# Altium PCB PCB2.PcbDoc
Units mil, origin at the board's own origin, x right, y up, seen from the top; angles counter-clockwise.
Board outline 3040 x 2755 mil, 2 copper layers (Top Layer, Bottom Layer); 100 components, 34 nets, 244 pads, 4 vias.
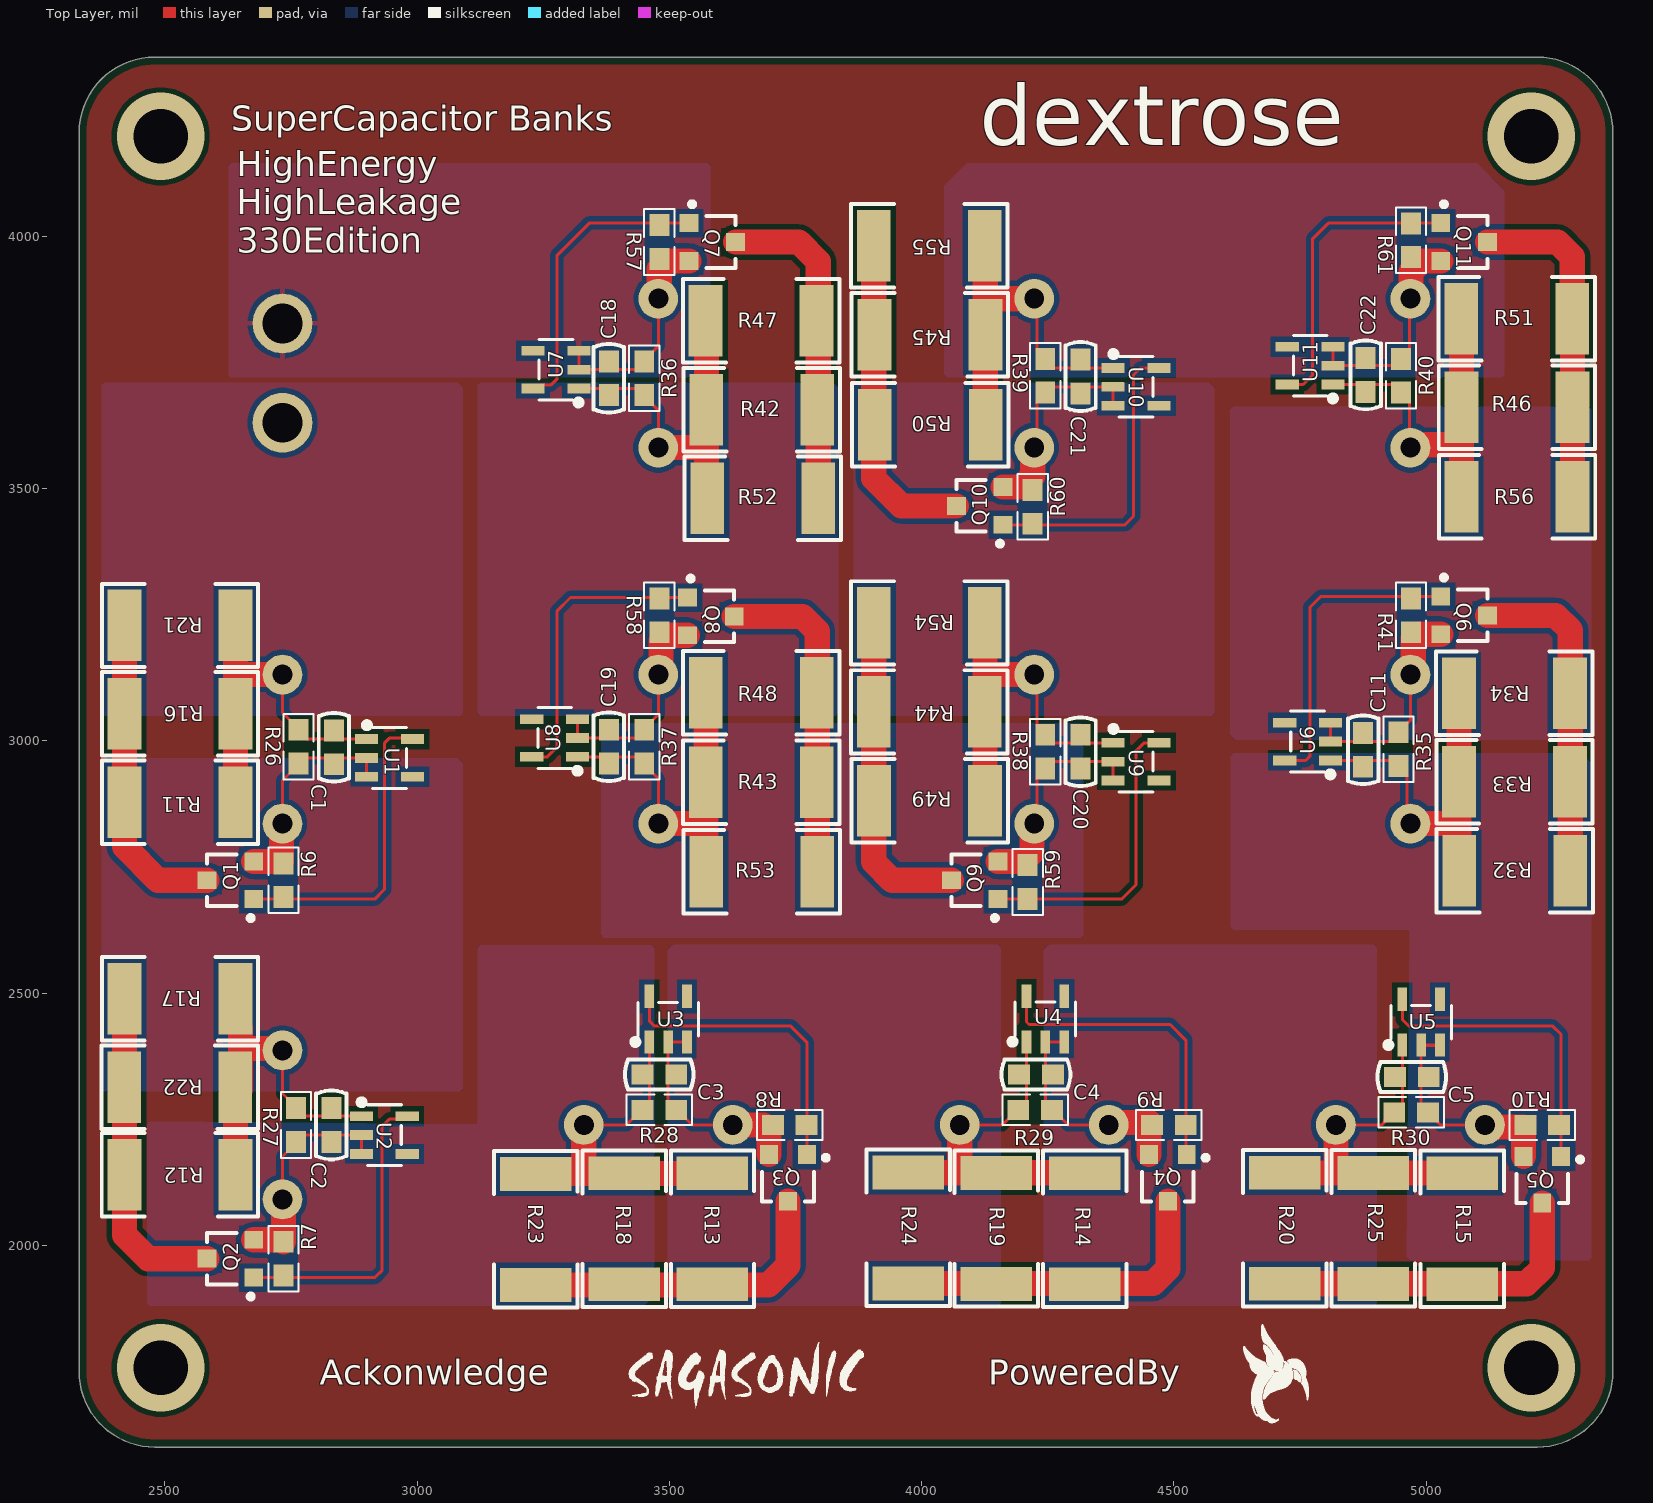
[diagram p0: Top Layer view]
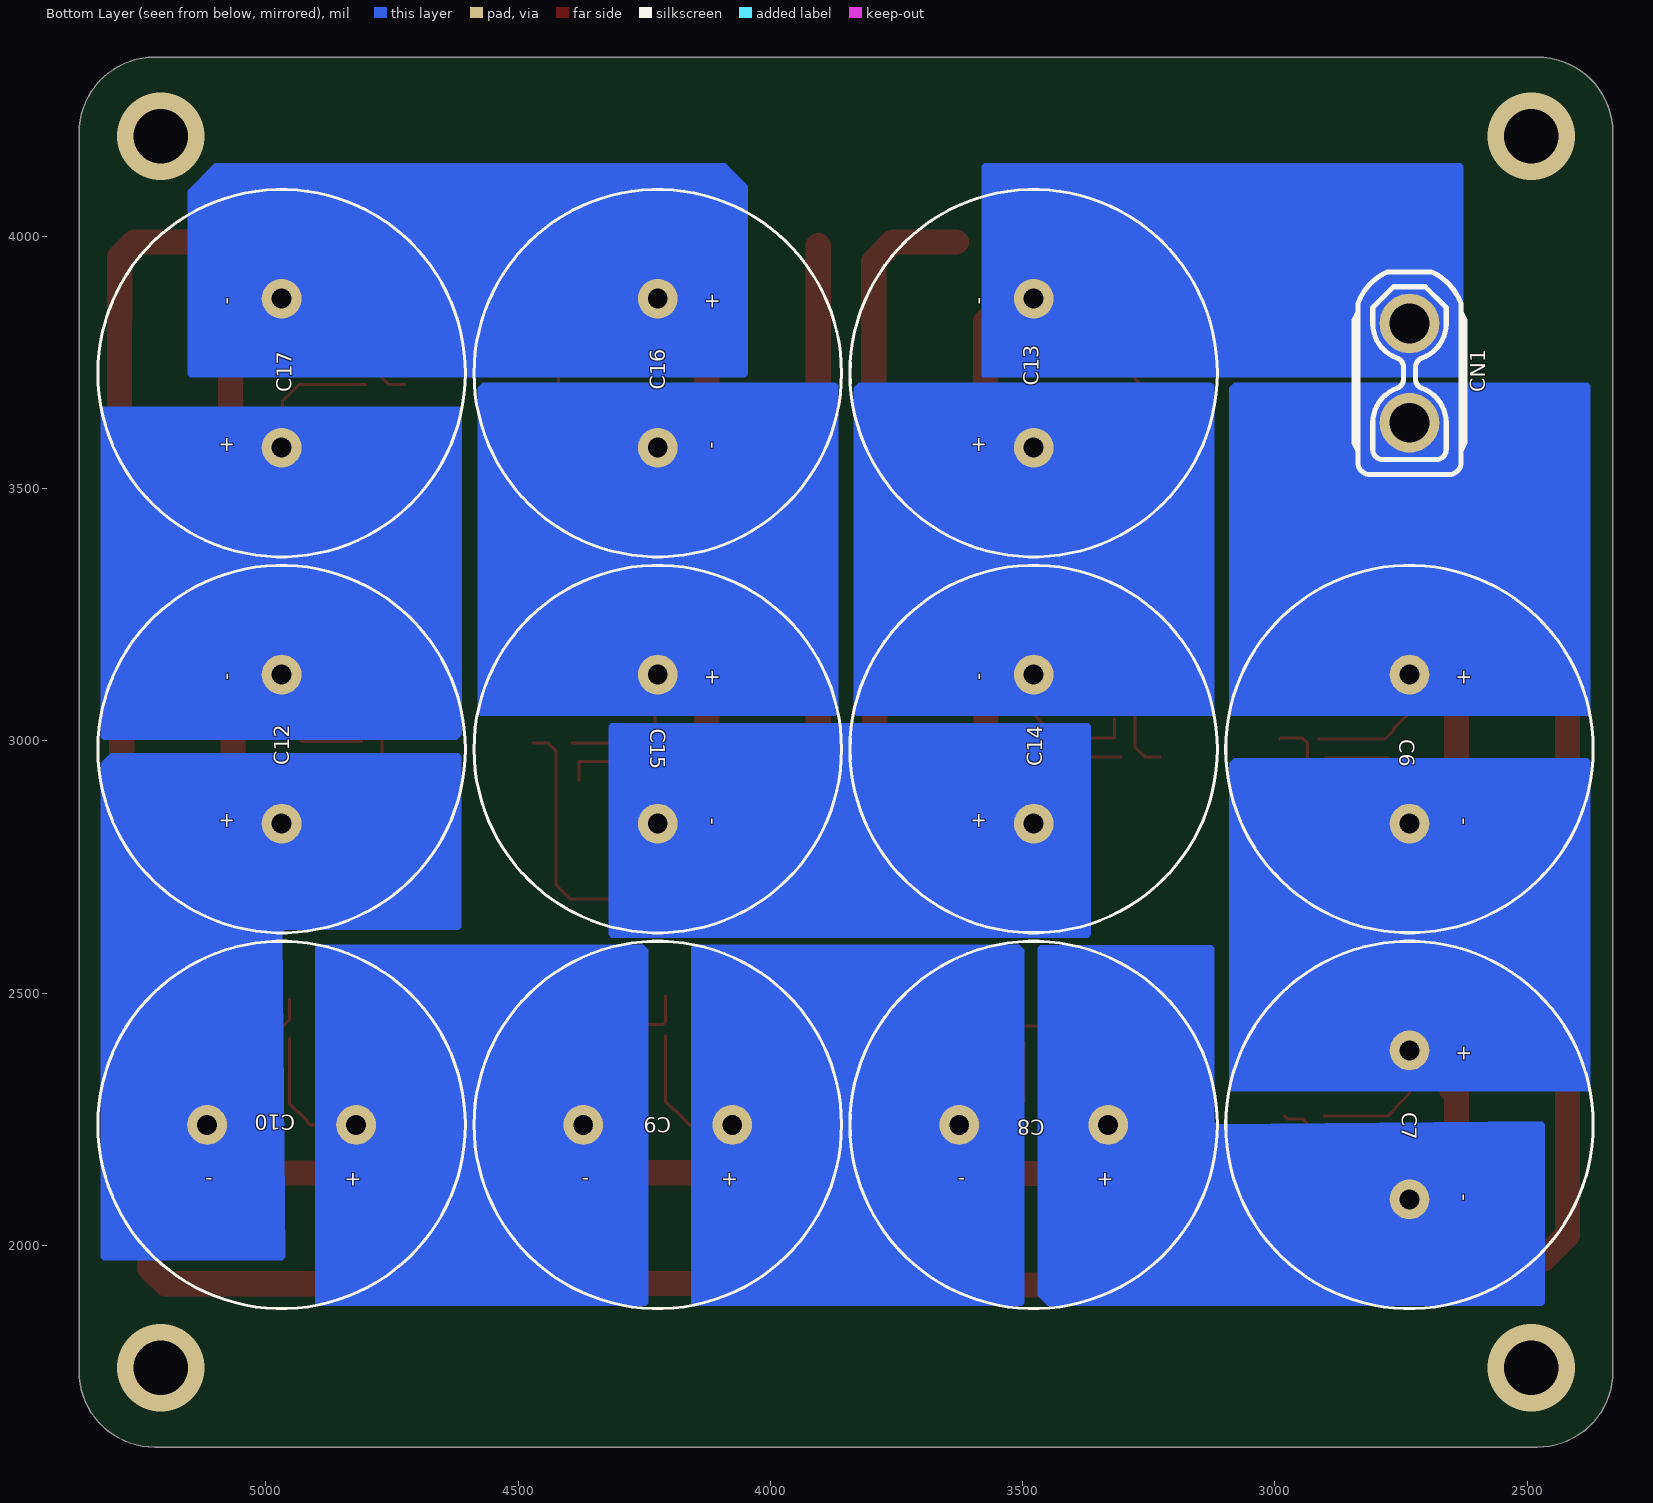
[diagram p1: Bottom Layer view, seen from below]

## Layer stack, top to bottom
Top Solder: solder mask 0.4, Solder Resist, Dk 3.5
Top Layer: signal copper 1.4
Dielectric 1: dielectric 12.6, FR-4, Dk 4.8
Bottom Layer: signal copper 1.4
Bottom Solder: solder mask 0.4, Solder Resist, Dk 3.5

## Board outline
2330,1750 ccw(c2480,1750) 2480,1600 5220,1600 ccw(c5220,1750) 5370,1750 5370,4205 ccw(c5220,4205) 5220,4355 2480,4355 ccw(c2480,4205) 2330,4205

## Design rules (kind name [scope] priority, off if disabled: settings)
BoardOutlineClearance [All] p1: gap=15 ignorepadtopadclearanceinfootprint=FALSE
Clearance Clearance_1 [InPolygon] p1: gap=10 ignorepadtopadclearanceinfootprint=FALSE
Clearance [All] p2: gap=6 ignorepadtopadclearanceinfootprint=FALSE
MinimumSolderMaskSliver [All] p1: minsoldermaskwidth=0
PolygonConnect [All] p1: connectstyle=Relief reliefconductorwidth=10 reliefentries=4 polygonreliefangle="90 Angle" airgapwidth=10
RoutingVias [All] p1: holewidth=28 width=50 viastyle="Through Hole" minholewidth=28 minwidth=50 maxholewidth=28 maxwidth=50
SilkToSilkClearance [All] p1: silktosilkclearance=0
SilkToSolderMaskClearance [IsPad] p1: minsilkscreentomaskgap=0 clearancetoexposedcopper=TRUE
SolderMaskExpansion [All] p1: expansion=4 istentingtop=FALSE
Width [All] p1: maxlimit=300 minlimit=6 preferedwidth=10
27 further rules are at their usual default settings.

## Components (designator, comment, footprint, x,y, rotation, side; value= is the part's Value field where it differs from the comment)
C1 "100nF" C-RAD-0603 2835,2986.93 r270 top
C2 "100nF" C-RAD-0603 2830,2238.46 r270 top
C3 "100nF" C-RAD-0603 3480,2338.46 r0 top
C4 "100nF" C-RAD-0603 4226.54,2338.46 r0 top
C5 "100nF" C-RAD-0603 4971.54,2333.46 r0 top
C6 "SuperCap" C_supercap1 2733.15,2983.46 r270 bottom
C7 "SuperCap" C_supercap1 2733.15,2238.57 r270 bottom
C8 "SuperCap" C_supercap1 3478.02,2238.57 r0 bottom
C9 "SuperCap" C_supercap1 4223.05,2238.57 r0 bottom
C10 "SuperCap" C_supercap1 4968.66,2238.57 r0 bottom
C11 "100nF" C-RAD-0603 4875,2981.93 r90 top
C12 "SuperCap" C_supercap1 4968.66,2983.45 r90 bottom
C13 "SuperCap" C_supercap1 3478.02,3728.62 r90 bottom
C14 "SuperCap" C_supercap1 3478.02,2983.46 r90 bottom
C15 "SuperCap" C_supercap1 4223.05,2983.45 r270 bottom
C16 "SuperCap" C_supercap1 4223.05,3728.62 r270 bottom
C17 "SuperCap" C_supercap1 4968.66,3728.62 r90 bottom
C18 "100nF" C-RAD-0603 3380,3718.46 r90 top
C19 "100nF" C-RAD-0603 3380,2988.46 r90 top
C20 "100nF" C-RAD-0603 4315,2978.46 r270 top
C21 "100nF" C-RAD-0603 4315,3721.93 r270 top
C22 "100nF" C-RAD-0603 4880,3725 r90 top
CN1 "Changzhou" CONN-TH_XT30UPB-F 2733.15,3728.62 r90 bottom
Q1 "AO3400A" SOT-23 2630,2723.46 r90 top
Q2 "AO3400A" SOT-23 2630,1973.46 r90 top
Q3 "AO3400A" SOT-23 3735,2133.46 r180 top
Q4 "AO3400A" SOT-23 4488,2133.46 r180 top
Q5 "AO3400A" SOT-23 5230,2130 r180 top
Q6 "AO3400A" SOT-23 5075,3248.46 r270 top
Q7 "AO3400A" SOT-23 3585,3988.46 r270 top
Q8 "AO3400A" SOT-23 3582.17,3246.46 r270 top
Q9 "AO3400A" SOT-23 4105,2723.46 r90 top
Q10 "AO3400A" SOT-23 4115,3465.46 r90 top
Q11 "AO3400A" SOT-23 5075,3988.46 r270 top
R6 "10kΩ" 0603-1 2735,2723.46 r270 top
R7 "10kΩ" 0603-1 2735,1973.46 r270 top
R8 "10kΩ" 0603-1 3738.46,2238.46 r0 top
R9 "10kΩ" 0603-1 4490,2238.46 r0 top
R10 "10kΩ" 0603-1 5230,2238.46 r0 top
R11 "2.2Ω" 2512 2530,2878.46 r0 top
R12 "2.2Ω" 2512 2529.91,2139.97 r0 top
R13 "2.2Ω" 2512 3585.39,2033 r90 top
R14 "2.2Ω" 2512 4322.89,2032.93 r90 top
R15 "2.2Ω" 2512 5071.41,2032.95 r90 top
R16 "2.2Ω" 2512 2530,3053.46 r0 top
R17 "2.2Ω" 2512 2530,2488.46 r0 top
R18 "2.2Ω" 2512 3410.56,2032.57 r90 top
R19 "2.2Ω" 2512 4148.04,2033.25 r90 top
R20 "2.2Ω" 2512 4719.65,2033.94 r90 top
R21 "2.2Ω" 2512 2530,3228.46 r0 top
R22 "2.2Ω" 2512 2529.28,2313.58 r0 top
R23 "2.2Ω" 2512 3235,2031.54 r90 top
R24 "2.2Ω" 2512 3973.42,2034.42 r90 top
R25 "2.2Ω" 2512 4895,2033.46 r90 top
R26 "10kΩ" 0603-1 2765,2988.46 r270 top
R27 "10kΩ" 0603-1 2760,2238.46 r270 top
R28 "10kΩ" 0603-1 3480,2268.46 r0 top
R29 "10kΩ" 0603-1 4225,2268.46 r0 top
R30 "10kΩ" 0603-1 4970,2263.46 r0 top
R32 "2.2Ω" 2512 5175.64,2742.71 r180 top
R33 "2.2Ω" 2512 5175,2918.46 r180 top
R34 "2.2Ω" 2512 5174.75,3094.44 r180 top
R35 "10kΩ" 0603-1 4945,2983.46 r90 top
R36 "10kΩ" 0603-1 3450,3718.46 r90 top
R37 "10kΩ" 0603-1 3450,2988.46 r90 top
R38 "10kΩ" 0603-1 4245,2978.46 r270 top
R39 "10kΩ" 0603-1 4245,3723.46 r270 top
R40 "10kΩ" 0603-1 4950,3723.46 r90 top
R41 "10kΩ" 0603-1 4970,3248.46 r90 top
R42 "2.2Ω" 2512 3682.85,3656.25 r180 top
R43 "2.2Ω" 2512 3681.81,2917.79 r180 top
R44 "2.2Ω" 2512 4014.8,3057.03 r0 top
R45 "2.2Ω" 2512 4016.27,3804.95 r0 top
R46 "2.2Ω" 2512 5179.81,3661.2 r180 top
R47 "2.2Ω" 2512 3681.75,3832.1 r180 top
R48 "2.2Ω" 2512 3681.98,3095.16 r180 top
R49 "2.2Ω" 2512 4015.75,2881.38 r0 top
R50 "2.2Ω" 2512 4016.89,3626.68 r0 top
R51 "2.2Ω" 2512 5179.6,3836.45 r180 top
R52 "2.2Ω" 2512 3685,3480.46 r180 top
R53 "2.2Ω" 2512 3682.83,2740.46 r180 top
R54 "2.2Ω" 2512 4015,3233.46 r0 top
R55 "2.2Ω" 2512 4015,3981.46 r0 top
R56 "2.2Ω" 2512 5180,3483.46 r180 top
R57 "10kΩ" 0603-1 3480,3988.46 r90 top
R58 "10kΩ" 0603-1 3480,3248.46 r90 top
R59 "10kΩ" 0603-1 4210,2720 r270 top
R60 "10kΩ" 0603-1 4220,3463.46 r270 top
R61 "10kΩ" 0603-1 4970,3991.93 r90 top
U1 "BW6103" SOT-23-5_L3.0-W1.7-P0.95-LS2.8-BL 2945.42,2965.86 r270 top
U2 "BW6103" SOT-23-5_L3.0-W1.7-P0.95-LS2.8-BL 2935,2218.46 r270 top
U3 "BW6103" SOT-23-5_L3.0-W1.7-P0.95-LS2.8-BL 3497.6,2448.04 r0 top
U4 "BW6103" SOT-23-5_L3.0-W1.7-P0.95-LS2.8-BL 4245,2448.46 r0 top
U5 "BW6103" SOT-23-5_L3.0-W1.7-P0.95-LS2.8-BL 4990,2441.93 r0 top
U6 "BW6103" SOT-23-5_L3.0-W1.7-P0.95-LS2.8-BL 4765,2998.46 r90 top
U7 "BW6103" SOT-23-5_L3.0-W1.7-P0.95-LS2.8-BL 3275,3735.46 r90 top
U8 "BW6103" SOT-23-5_L3.0-W1.7-P0.95-LS2.8-BL 3272.83,3005.46 r90 top
U9 "BW6103" SOT-23-5_L3.0-W1.7-P0.95-LS2.8-BL 4425,2958.46 r270 top
U10 "BW6103" SOT-23-5_L3.0-W1.7-P0.95-LS2.8-BL 4425,3701.46 r270 top
U11 "BW6103" SOT-23-5_L3.0-W1.7-P0.95-LS2.8-BL 4770,3743.46 r90 top

## Footprints (in the part's own frame and the unit in brackets; to place one, negate y for a bottom-side part, rotate by r counter-clockwise, add the part's x,y. Pads: shape width x height; smd on the part's side, far side on the other; paste and mask are expansions set on the pad)
0603-1 [mm] "贴片带丝印"
  rect 1.1x1 smd: 1(-0.85,0) 2(0.85,0)
  silkscreen extent -1.65,-0.76 1.65,0.76, body extent -1.14,-0.38 1.14,0.38, height 1
2512 [mm] "保险丝"
  rect 1.7x3.6 smd: 1(-2.794,0) 2(2.794,0)
  silkscreen extent -3.94,-2.1 3.94,2.1, body extent -3.17,-1.65 3.17,1.65, height 1.2
C-RAD-0603 [mm] "贴片电容"
  rect 1.1x1 smd: 1(-0.85,0) 2(0.85,0)
  silkscreen extent -1.73,-0.76 1.73,0.76, body extent -1.14,-0.38 1.14,0.38, height 1
C_supercap1 [mm]
  round 2 hole 1: 1(-3.75,0) 2(3.75,0)
  silkscreen extent -9.25,-9.25 9.25,9.25
CONN-TH_XT30UPB-F [mm]
  round 3 hole 2: 1(-2.5,0) 2(2.5,0)
  silkscreen extent -5.1,-2.8 5.1,2.8
SOT-23 [mm]
  rect 0.9x0.95 smd: 1(-0.95,-1.175) 2(0.95,-1.175) 3(0,1.175)
  silkscreen extent -2.03,-1.14 1.3,1.18
SOT-23-5_L3.0-W1.7-P0.95-LS2.8-BL [mm]
  rect 0.49x1.157 smd mask+0.051: 1(-0.95,-1.154) 2(0,-1.154) 3(0.95,-1.154)
  rect 0.49x1.175 smd mask+0.051: 4(0.95,1.154) 5(-0.95,1.154)
  silkscreen extent -1.8,-1.29 1.53,0.85

## Part data
C1 C2 C3 C4 C5 C11 C18 C19 C20 C21 C22: BOM_JLCPCB Part Class="Extended Part", BOM_Manufacturer="Guangdong Fenghua Advanced Tech", BOM_Manufacturer Part=0805CG330J500NT, BOM_Supplier=LCSC, BOM_Supplier Part=C157687, Contributor=LCSC, nameAlias=Capacitance, spicePre=C, spiceSymbolName=0805CG330J500NT
C6 C7 C8 C9 C10 C12 C13 C14 C15 C16 C17: library part "50F 2.7v"
CN1: BOM_JLCPCB Part Class="Extended Part", BOM_Manufacturer="Changzhou Amass Elec", BOM_Manufacturer Part=XT30UPB-F, BOM_Supplier=LCSC, BOM_Supplier Part=C108769, Contributor=LCSC, nameAlias=Value, spicePre=C, spiceSymbolName=XT30UPB-F
Q1 Q2 Q3 Q4 Q5 Q6 Q7 Q8 Q9 Q10 Q11: library part AO3400A_C20917, Continuous Drain Current (Id)=5.7A, Drain Source On Resistance (RDS(on)@Vgs,Id)=26.5mΩ@10V,5.7A, Drain Source Voltage (Vdss)=30V, Gate Threshold Voltage (Vgs(th)@Id)=1.5V@250μA, JLCPCB Part Class="Basic Part", LCSC Part Name="N沟道 30V 5.7A", Manufacturer=AOS, Power Dissipation (Pd)=1.4W, Add into BOM=yes, Convert to PCB=yes, Datasheet=https://atta.szlcsc.com/upload/public/pdf/source/20140107/1457706668533.pdf, Device=AO3400A_C20917, Manufacturer Part=AO3400A, Name=AO3400A, Supplier=LCSC, Supplier Footprint=SOT-23-3L, Supplier Part=C20917, Symbol=AO3400A, Type=N沟道
R6 R7 R8 R9 R10 R26 R27 R28 R29 R30 R35 R36 R37 R38 R39 R40 R41 R57 R58 R59 R60 R61: BOM_JLCPCB Part Class="Basic Part", BOM_Manufacturer=UniOhm, BOM_Manufacturer Part=0603WAF1002T5E, Resistance (Ohms)=10K, BOM_Supplier=LCSC, BOM_Supplier Part=C25804, nameAlias=Resistance, spicePre=R, spiceSymbolName=0603WAF1002T5E
R11 R12 R13 R14 R15 R16 R17 R18 R19 R20 R21 R22 R23 R24 R25 R32 R33 R34 R42 R43 R44 R45 R46 R47 R48 R49 R50 R51 R52 R53 R54 R55 R56: library part 2.2Ω_2512, BOM_JLCPCB Part Class="Basic Part", BOM_Manufacturer=UniOhm, BOM_Manufacturer Part=0603WAF1002T5E, Resistance (Ohms)=10K, BOM_Supplier=LCSC, BOM_Supplier Part=C25804, nameAlias=Resistance, spicePre=R, spiceSymbolName=0603WAF1002T5E
U1 U2 U3 U4 U5 U6 U7 U8 U9 U10 U11: Dropout Voltage=400mV@(500mA), JLCPCB Part Class="Extended Part", Manufacturer=RICHTEK(台湾立锜), Manufacturer Part=RT9013-33GB, Maximum Input Voltage=5.5V, Output Current=500mA, Output Voltage=3.3V, Power Supply Rejection Ratio (PRSS)=50dB@(10kHz), Quiescent Current (Ground Current)=-, Add into BOM=yes, Convert to PCB=yes, Datasheet=https://atta.szlcsc.com/upload/public/pdf/source/20150504/1457707282459.pdf, Device=BW6101, Feature=-, Name=RT9013-33GB, Noise=-, Number of Outputs=1, Output Polarity=正, Output Type=固定, Supplier=LCSC, Supplier Footprint=SOT-23-5, Supplier Part=C47773, Symbol=BW6101

## Via types
v1: diameter 173.23, hole 108.27, Top Layer to Bottom Layer, 4 vias

## Nets (pads, with @x,y where several pads share a name; then routed paths per layer and width w, separated by ;. In a path a pad name is that pad's centre, name@x,y a point inside that pad or via, vN(x,y) a via of type N, cw(c..) or ccw(c..) an arc to the next point about the centre after c; other vN are vias at no path point)
NetC1_1: C1.1 C6.1 CN1.1 R11.2 R16.2 R21.2 R26.1 U1.1 | length 723
  Top Layer w6: C6.1 2733.15,3055.74 2765,3023.9 R26.1 2765,3019.96 2781.7,3003.26 U1.1 U1.1@2913.13,3003.26
  Top Layer w50: R11.2 R16.2 2640,3130 ; R21.2 2640,3130 ; C6.1 2641.1,3131.1 2640,3130
NetC1_2: C1.2 C2.1 C6.2 C7.1 Q1.2 R6.1 R12.2 R17.2 R22.2 R26.2 R27.1 U1.2 U1.3 U2.1 | length 1156.2
  Top Layer w6: R17.2 2640,2440 R17.2@2650,2430 ; C7.1 2733.15,2300.74 2760,2273.9 R27.1 2776.06,2255.86 U2.1 U2.1@2902.71,2255.86 ; C6.2 2733.15,2921.19 2765,2953.03 R26.2 2775.86,2965.86 U1.2 U1.3
  Top Layer w50: R12.2 2639.91,2298.64 2650,2308.73 2650,2390 ; R17.2@2650,2430 2650,2390 ; Q1.2 2731.06,2760.87 2731.06,2833.74 C6.2 ; C7.1 2729.36,2390 2650,2390
NetC2_2: C2.2 C3.1 C7.2 C8.1 Q2.2 R7.1 R13.2 R18.2 R23.2 R27.2 R28.1 U2.2 U2.3 U3.1 | length 1164.7
  Top Layer w6: C7.2 2733.15,2176.19 2760,2203.03 R27.2 2773.46,2218.46 U2.2 U2.3 ; C8.1 3414.67,2238.57 3444.57,2268.46 R28.1 3460.2,2282.13 U3.1 U3.1@3460.2,2415.75
  Top Layer w50: Q2.2 R7.1@2731.06,2010.87 ; R7.1 C7.2@2735,2089.09 ; R23.2@3235.73,2142.27 3325,2142.27 ; C8.1 3330.38,2147.65 3325,2142.27 ; R13.2 3584.65,2142.27 3325,2142.27
NetC3_2: C3.2 C4.1 C8.2 C9.1 Q3.2 R8.1 R14.2 R19.2 R24.2 R28.2 R29.1 U3.2 U3.3 U4.1 | length 1142.7
  Top Layer w6: U3.3 U3.2 3497.6,2284.33 R28.2 3515.43,2268.46 3545.33,2238.57 C8.2 ; C9.1 4159.67,2238.57 4189.57,2268.46 R29.1 4207.6,2284.53 U4.1 U4.1@4207.6,2416.17
  Top Layer w50: C8.2 R8.1@3686.27,2238.57 ; Q3.2 R8.1@3697.6,2231.06 ; R24.2 3974.16,2143.67 4075,2143.67 ; C9.1 4075.41,2144.08 4075,2143.67 ; R14.2 4322.15,2143.67 4075,2143.67
NetC4_2: C4.2 C5.1 C9.2 C10.1 Q4.2 R9.1 R15.2 R20.2 R25.2 R29.2 R30.1 U4.2 U4.3 U5.1 | length 1166.7
  Top Layer w6: U4.3 U4.2 4245,2281.93 R29.2 4260.43,2268.46 4290.33,2238.57 C9.2 ; C10.1 4911.64,2238.57 4917.88,2244.81 4917.88,2246.78 4934.57,2263.46 R30.1 4952.6,2279.53 U5.1 U5.1@4952.6,2409.64
  Top Layer w50: C9.2 4375.37,2243.25 R9.1@4451.75,2243.25 ; Q4.2 R9.1@4450.6,2232.53 ; R20.2 4720.14,2143.44 R25.2@4825,2143.44 ; C10.1 4821.02,2147.43 R25.2@4825,2143.44 ; R15.2 5070.91,2143.44 R25.2@4825,2143.44
NetC5_2: C5.2 C10.2 C11.1 C12.1 Q5.2 R10.1 R30.2 R32.2 R33.2 R34.2 R35.1 U5.2 U5.3 U6.1 | length 1163.9
  Top Layer w6: U6.1@4797.29,2961.06 U6.1 4933.94,2961.06 R35.1 4961.69,2933.32 4961.69,2842.79 C12.1 ; U5.3 U5.2 4990,2276.93 R30.2 5005.43,2263.46 5022.12,2246.78 5022.12,2244.81 5028.36,2238.57 C10.2
  Top Layer w50: C12.1 5059.38,2835.82 5065.19,2830 ; R34.2 5065.19,3093.99 5065.19,2830 ; R32.2 5065.19,2743.16 5065.19,2830 ; C10.2 5120.34,2234.53 5192.6,2234.53 Q5.2
NetC11_2: C11.2 C12.2 C17.1 C22.1 Q6.2 R35.2 R40.1 R41.1 R46.2 R51.2 R56.2 U6.2 U6.3 U11.1 | length 1167.7
  Top Layer w6: U11.1@4802.29,3706.06 U11.1 4933.94,3706.06 R40.1 4966.69,3673.32 4966.69,3582.95 C17.1 ; U6.3 U6.2 4928.31,2998.46 4945,3015.15 4945,3018.9 4961.69,3035.58 4963.65,3035.58 4968.66,3040.59 C12.2
  Top Layer w50: C12.2 4974.16,3136.59 4974.16,3204.16 4981.06,3211.06 Q6.2 ; C17.1 4974.16,3586.48 5066.28,3586.48 5069.8,3590 ; R51.2 5069.8,3836.25 5069.8,3590 ; R56.2 5069.8,3483.66 5069.8,3590
NetC13_1: C13.1 C14.2 C18.1 C19.2 Q8.2 R36.1 R37.2 R42.2 R47.2 R52.2 R58.1 U7.1 U8.2 U8.3 | length 1123.8
  Top Layer w6: U8.3 U8.2 3433.54,3005.46 R37.2 3450,3023.9 3478.02,3051.92 C14.2 ; U7.1 3436.94,3698.06 R36.1 3450,3683.03 3478.02,3655.01 C13.1
  Top Layer w50: C14.2 3483.18,3136.26 3483.18,3198.18 3494.06,3209.06 Q8.2 ; C13.1 3569.36,3580.98 3573.37,3585 ; R47.2 3573.37,3830.47 3573.37,3585 ; R52.2 3573.37,3482.09 3573.37,3585
NetC13_2: C13.2 C18.2 CN1.2 Q7.2 R36.2 R57.1 U7.2 U7.3 | length 449.4
  Top Layer w6: U7.3@3308.46,3779.51 3315.11,3772.86 U7.3 U7.2 3433.54,3735.46 R36.2 3450,3753.9 3478.02,3781.92 C13.2
  Top Layer w50: C13.2 3480.04,3878.28 3480.04,3935.04 3496.06,3951.06 Q7.2
NetC14_1: C14.1 C15.2 C19.1 C20.2 Q9.2 R37.1 R38.2 R43.2 R48.2 R53.2 R59.1 U8.1 U9.2 U9.3 | length 1161.8
  Top Layer w6: U8.1@3305.12,2968.06 U8.1 3436.94,2968.06 R37.1 3450,2953.03 3478.02,2925.01 C14.1 ; C15.2 4228.31,2841.08 4228.31,2928.31 R38.2 4258.46,2958.46 U9.2 U9.3
  Top Layer w50: C14.1 3568.23,2835.83 3572.4,2840 ; R48.2 3572.4,3094.74 3572.4,2840 ; R53.2 3572.4,2740.89 3572.4,2840 ; Q9.2 4200.87,2760.87 4218.56,2778.56 4218.56,2831.33 C15.2
NetC15_1: C15.1 C16.2 C20.1 C21.2 Q10.2 R38.1 R39.2 R44.2 R49.2 R54.2 R60.1 U9.1 U10.2 U10.3 | length 1153.1
  Top Layer w6: C15.1 4228.31,3125.82 4228.31,3028.61 R38.1 4261.06,2995.86 U9.1 U9.1@4392.71,2995.86 ; C16.2 4228.31,3586.25 4228.31,3673.31 R39.2 4256.46,3701.46 U10.2 U10.3
  Top Layer w50: R54.2 4125.38,3233.09 4125.38,3130 ; R49.2 4125.38,2881.76 4125.38,3130 ; Q10.2 4197.87,3502.87 4219.96,3524.96 4219.96,3577.9 C16.2 ; C15.1 4126.47,3131.09 4125.38,3130
NetC16_1: C16.1 C17.2 C21.1 C22.2 Q11.2 R39.1 R40.2 R45.2 R50.2 R55.2 R61.1 U10.1 U11.2 U11.3 | length 1151.9
  Top Layer w6: C16.1 4228.31,3870.99 4228.31,3773.61 R39.1 4245,3755.55 4261.69,3738.86 U10.1 ; U11.3 U11.2 4936.54,3743.46 R40.2 4966.69,3773.61 4966.69,3874.29 C17.2
  Top Layer w50: R55.2 4125.95,3980.52 4125.95,3880 ; R50.2 4125.95,3627.62 4125.95,3880 ; C16.1 4129.69,3876.26 4125.95,3880 ; C17.2 4970.04,3877.64 4970.04,3930.04 4991.06,3951.06 Q11.2
NetQ1_1: Q1.1 R6.2 U1.5 | length 617.3
  Top Layer w6: Q1.1 2916.06,2686.06 2935,2705 2935,2995 2945,3005 2989.1,3005 U1.5
NetQ1_3: Q1.3 R11.1 R16.1 R21.1 | length 629.8
  Top Layer w50: R21.1 R16.1 R11.1 2420,2790 2486.54,2723.46 Q1.3
NetQ2_1: Q2.1 R7.2 U2.5 | length 603.6
  Top Layer w6: Q2.1 2735,1936.06 2916.06,1936.06 2930.77,1950.77 2930.77,2235.77 2945,2250 2974.56,2250 U2.5
NetQ2_3: Q2.3 R12.1 R17.1 R22.1 | length 651.5
  Top Layer w50: R17.1 2420,2313.58 2420,2139.97 2420,2020 2466.54,1973.46 Q2.3
NetQ3_1: Q3.1 R8.2 U3.5 | length 601.2
  Top Layer w6: U3.5 3460.2,2444.8 3470.6,2434.4 3740.6,2434.4 3772.4,2402.6 Q3.1
NetQ3_3: Q3.3 R13.1 R18.1 R23.1 | length 643.1
  Top Layer w50: R23.1 3696.54,1921.54 3735,1960 Q3.3
NetQ4_1: Q4.1 R9.2 U4.5 | length 609.8
  Top Layer w6: U4.5 4207.6,2442.4 4212.5,2437.5 4492.5,2437.5 4523.46,2406.54 R9.2 4523.46,2181.66 Q4.1
NetQ4_3: Q4.3 R14.1 R19.1 R24.1 | length 660.2
  Top Layer w50: R24.1 4458.71,1924.42 4488,1953.71 Q4.3
NetQ5_1: Q5.1 R10.2 U5.5 | length 608.4
  Top Layer w6: U5.5 4952.6,2447.4 4965,2435 5250,2435 5267.4,2417.6 5267.4,2238.46 Q5.1
NetQ5_3: Q5.3 R15.1 R20.1 R25.1 | length 652
  Top Layer w50: R20.1 5198.94,1923.94 5230,1955 Q5.3
NetQ6_1: Q6.1 R41.2 U6.5 | length 616.5
  Top Layer w6: U6.5 4761.06,2961.06 4770,2970 4770,3265 4790.87,3285.87 4970,3285.87 Q6.1
NetQ6_3: Q6.3 R32.1 R33.1 R34.1 | length 653
  Top Layer w50: Q6.3 5256.35,3248.46 5285.64,3219.18 R32.1
NetQ7_1: Q7.1 R57.2 U7.5 | length 588.5
  Top Layer w6: U7.5 3236.23,3704.71 3264.71,3704.71 3277.5,3717.5 3277.5,3962.5 3340.87,4025.87 Q7.1
NetQ7_3: Q7.3 R42.1 R47.1 R52.1 | length 649.2
  Top Layer w50: Q7.3 3756.54,3988.46 3795,3950 R52.1
NetQ8_1: Q8.1 R58.2 U8.5 | length 597.5
  Top Layer w6: U8.5 3258.06,2968.06 3277.5,2987.5 3277.5,3257.5 3303.87,3283.87 Q8.1
NetQ8_3: Q8.3 R43.1 R48.1 R53.1 | length 653.2
  Top Layer w50: Q8.3 3763.54,3246.46 3792.83,3217.18 3792.83,2917.79 R53.1
NetQ9_1: Q9.1 R59.2 U9.5 | length 602.7
  Top Layer w6: Q9.1 4210,2686.06 4396.06,2686.06 4425,2715 4425,2980 4440.86,2995.86 U9.5
NetQ9_3: Q9.3 R44.1 R49.1 R54.1 | length 642.3
  Top Layer w50: R54.1 3905,2760 3941.54,2723.46 Q9.3
NetQ10_1: Q10.1 R60.2 U10.5 | length 601.9
  Top Layer w6: Q10.1 4403.06,3428.06 4420,3445 4420,3725 4433.86,3738.86 U10.5
NetQ10_3: Q10.3 R45.1 R50.1 R55.1 | length 647.8
  Top Layer w50: R55.1 3905,3804.95 3905,3626.68 3905,3520 3959.54,3465.46 Q10.3
NetQ11_1: Q11.1 R61.2 U11.5 | length 594.8
  Top Layer w6: U11.5 4756.06,3706.06 4775,3725 4775,3995 4805.87,4025.87 Q11.1
NetQ11_3: Q11.3 R46.1 R51.1 R56.1 | length 656.4
  Top Layer w50: Q11.3 5260.31,3988.46 5289.6,3959.18 R51.1 5289.8,3836.25 R46.1 5289.8,3483.66 R56.1
pads on no net: U1.4 U2.4 U3.4 U4.4 U5.4 U6.4 U7.4 U8.4 U9.4 U10.4 U11.4
copper on no net:
  other v1: 2491.73,1757.03 5208.27,1757.03 2491.73,4197.97 5208.27,4197.97

## Polygon pours and split planes (outlines as drawn)
NetC13_2 on Top Layer "NONET_L-01_P-001" (solid, pour order 0): 3300,5140 2345,5140 1610,4405 1610,1485 2100,995 5325,995 5325,1060 6125,1860 6125,4430

## Other copper
Bottom Layer:
  region net NetC13_2: 3576.32,4144.18 3581.32,4139.18 3581.31,3721.95 3579.36,3720 2629.36,3720 2626.31,3723.05 2626.32,4139.18 2631.31,4144.18
  region net NetC16_1: 5100.82,4144.18 5155,4090 5155,3725 5150,3720 4050,3720 4045,3725 4045,4100 4089.18,4144.18
  region net NetC14_1: 4315,3035 4320,3030 4320,2615 4315,2610 3370,2610 3365,2615 3365,3030 3370,3035
  region net NetC5_2: 4961.71,1975.93 4967.23,1970.41 5322.23,1970.41 5327.23,1975.41 5327.23,2955.41 5307.23,2975.41 4617.23,2975.41 4612.23,2970.41 4612.23,2630.41 4617.23,2625.41 4962.23,2625.41 4967.27,2620.37
  region net NetC2_2: 2470.51,2245.51 2465,2240 2465,1885 2470,1880 3450,1880 3470,1900 3470,2590 3465,2595 3125,2595 3120,2590 3120,2245 3114.96,2239.96
  region net NetC13_1: 3119.86,3705 3124.86,3710 3824.87,3710 3834.86,3700 3834.86,3055 3829.86,3050 3124.86,3050 3119.86,3055
  region net NetC15_1: 3864.89,3704.99 3869.89,3709.99 4569.89,3709.99 4579.89,3699.99 4579.89,3054.99 4574.89,3049.99 3869.89,3049.99 3864.89,3054.99
  region net NetC11_2: 5326.81,3007.09 5321.81,3002.09 4621.81,3002.09 4611.81,3012.09 4611.81,3657.09 4616.81,3662.09 5321.81,3662.09 5326.81,3657.09
  region net NetC4_2: 4247.12,1880.41 4242.12,1885.41 4242.12,2585.41 4252.12,2595.41 4897.12,2595.41 4902.12,2590.41 4902.12,1885.41 4897.12,1880.41
  region net NetC3_2: 3501.51,1880.41 3496.51,1885.41 3496.51,2585.41 3506.51,2595.41 4151.51,2595.41 4156.51,2590.41 4156.51,1885.41 4151.51,1880.41
  region net NetC1_2: 2375,2960.1 2380,2965.1 3080,2965.1 3090,2955.1 3090,2310.1 3085,2305.1 2380,2305.1 2375,2310.1
  region net NetC1_1: 2375,3705 2380,3710 3080,3710 3090,3700 3090,3055 3085,3050 2380,3050 2375,3055

## Silkscreen, mask and mechanical layers (free items; w line width, h text height)
Top Overlay:
  drawing of 14 lines, arcs and shapes, not listed
  text "SuperCapacitor Banks" at 2632,4208.66 h50
  text "dextrose" at 4115,4180 h120
  text "HighEnergy" at 2642,4118.66 h50
  text "HighLeakage" at 2642,4043.66 h50
  text "330Edition" at 2642,3967 h50
  text "Ackonwledge" at 2807,1723.66 h50
  text "PoweredBy" at 4132,1723.66 h50
Mechanical 1:
  the board outline again, w10

## Text inside footprints (layer, text, board x,y; h text height)
C6: Bottom Overlay "+" at 2637.15,3142.46 h30 r90; Bottom Overlay "-" at 2637.15,2847.46 h30 r90
C7: Bottom Overlay "+" at 2637.15,2397.57 h30 r90; Bottom Overlay "-" at 2637.15,2102.57 h30 r90
C8: Bottom Overlay "+" at 3319.02,2142.57 h30 r180; Bottom Overlay "-" at 3614.02,2142.56 h30 r180
C9: Bottom Overlay "+" at 4064.05,2142.57 h30 r180; Bottom Overlay "-" at 4359.05,2142.56 h30 r180
C10: Bottom Overlay "+" at 4809.66,2142.57 h30 r180; Bottom Overlay "-" at 5104.66,2142.56 h30 r180
C12: Bottom Overlay "+" at 5064.66,2824.45 h30 r270; Bottom Overlay "-" at 5064.66,3119.45 h30 r270
C13: Bottom Overlay "+" at 3574.02,3569.62 h30 r270; Bottom Overlay "-" at 3574.02,3864.62 h30 r270
C14: Bottom Overlay "+" at 3574.02,2824.46 h30 r270; Bottom Overlay "-" at 3574.02,3119.46 h30 r270
C15: Bottom Overlay "+" at 4127.05,3142.45 h30 r90; Bottom Overlay "-" at 4127.04,2847.45 h30 r90
C16: Bottom Overlay "+" at 4127.05,3887.62 h30 r90; Bottom Overlay "-" at 4127.04,3592.62 h30 r90
C17: Bottom Overlay "+" at 5064.66,3569.62 h30 r270; Bottom Overlay "-" at 5064.66,3864.62 h30 r270